# Altium PCB DHT11_v2_PCB.PcbDoc
Units mm, origin at the board's own origin, x right, y up, seen from the top; angles counter-clockwise.
Board outline 22.5 x 38.5 mm, 2 copper layers (Top Layer, Bottom Layer), stack 1.571 mm thick; 5 components, 4 nets, 18 pads, 2 vias.
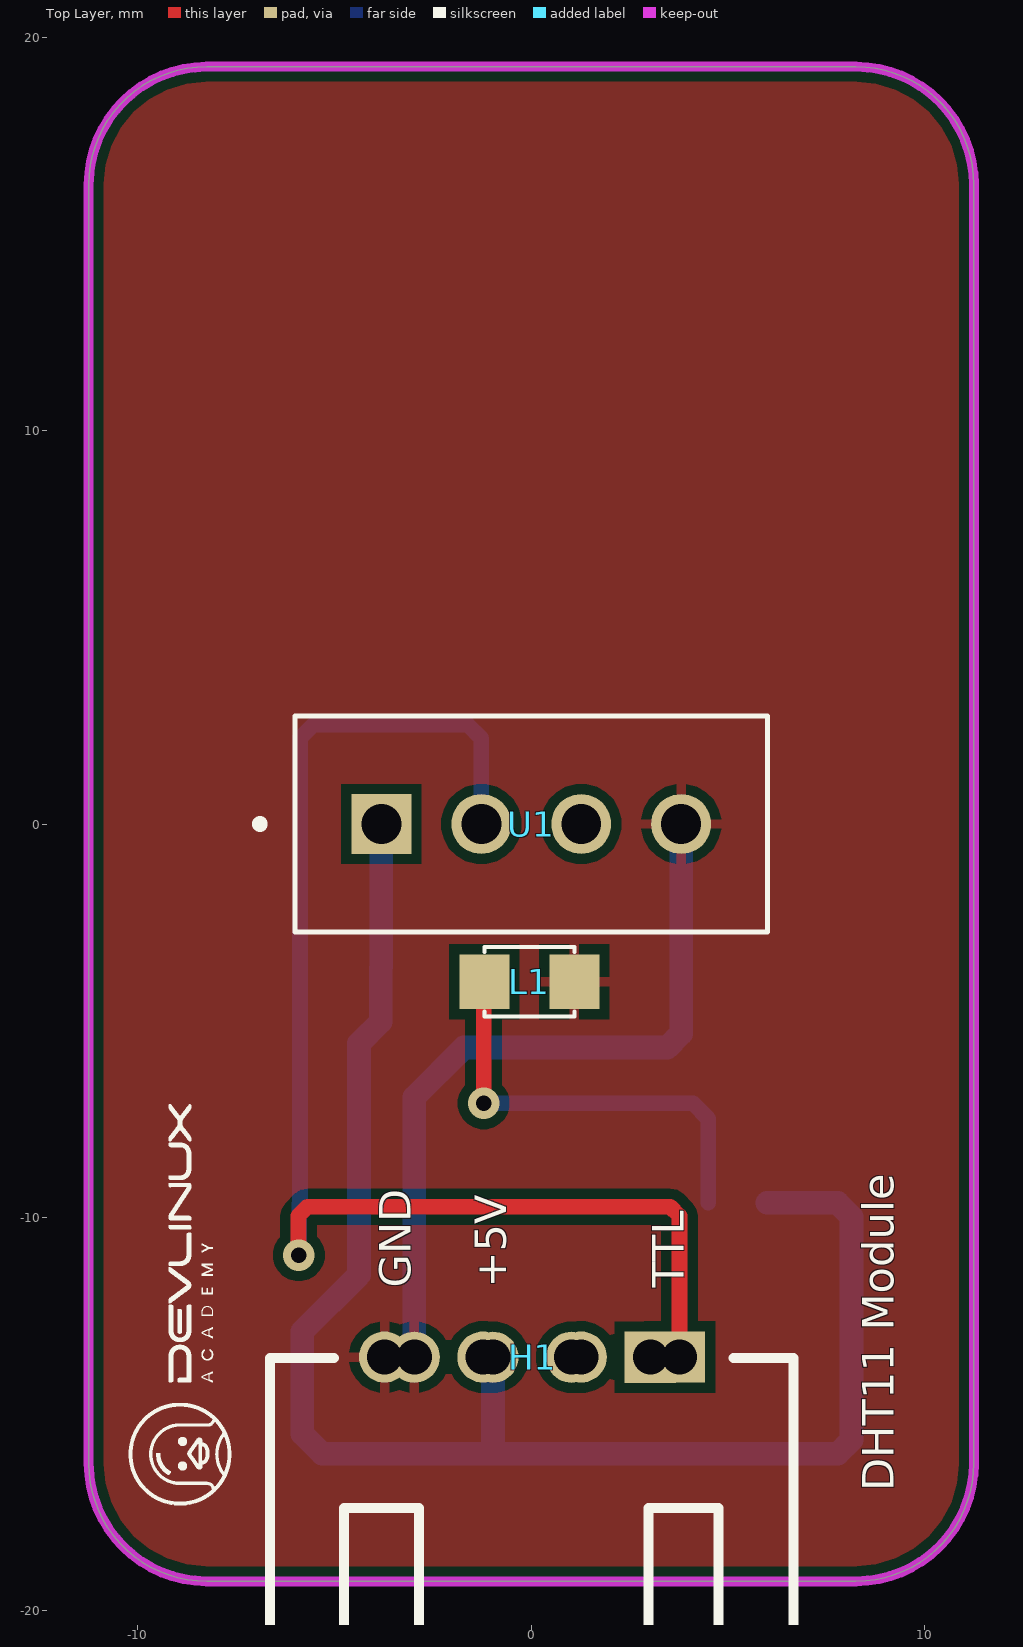
[diagram p0: Top Layer view]
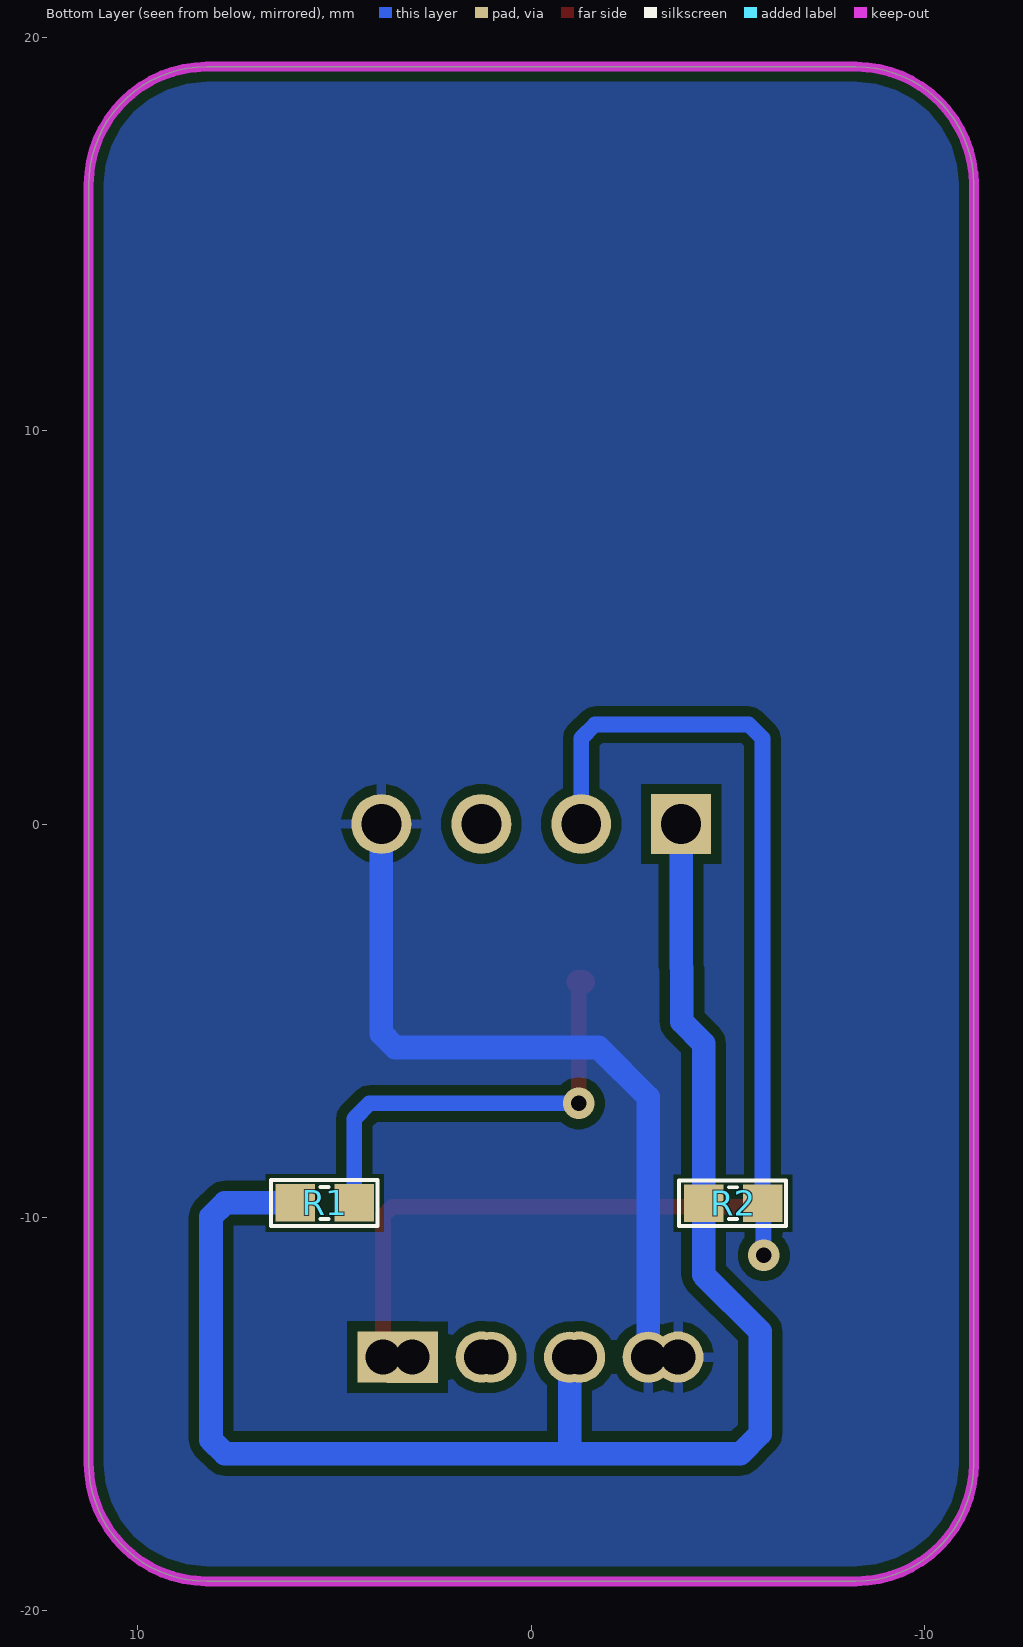
[diagram p1: Bottom Layer view, seen from below]
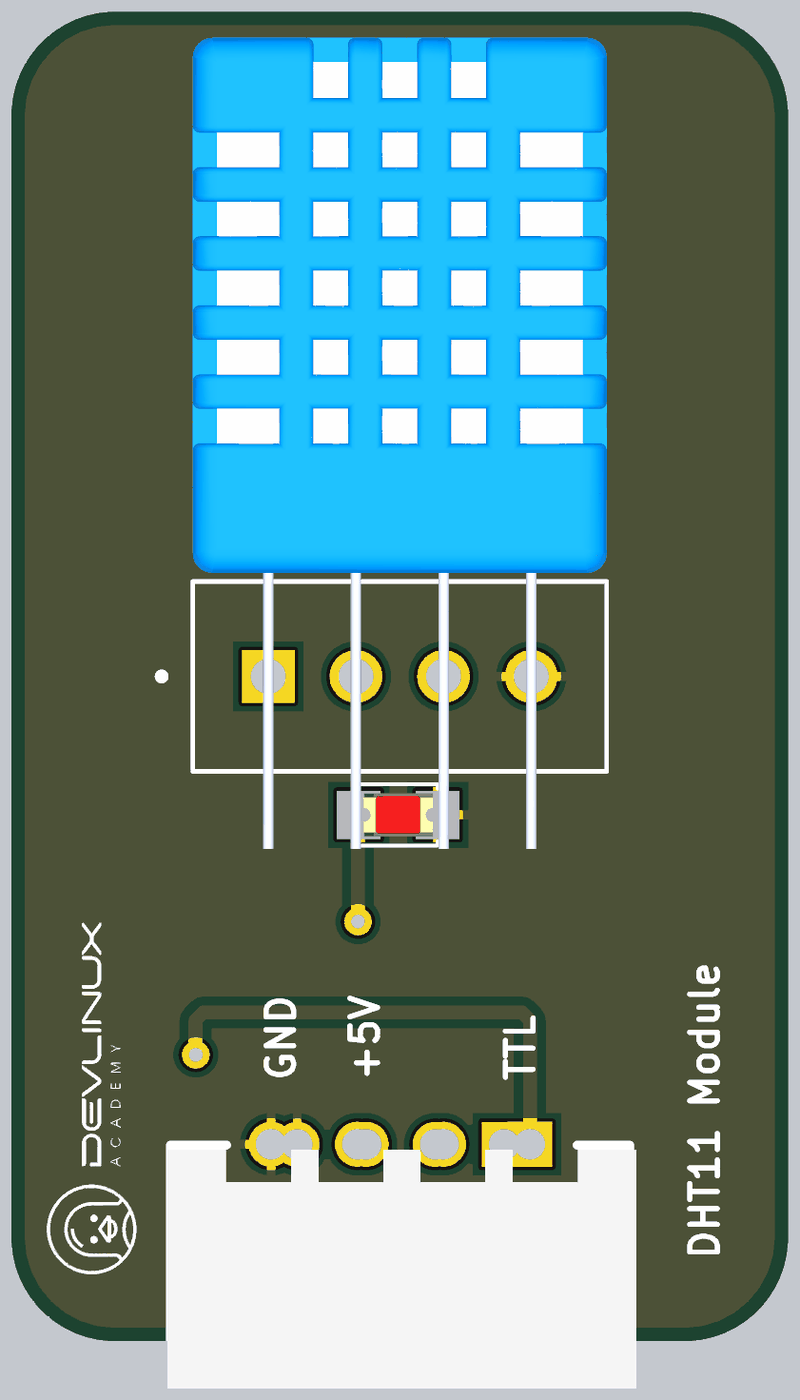
[diagram p2: 3D render of the assembled board from above, using the file's embedded part models]

## Layer stack, top to bottom
Top Solder: solder mask 0.0102, Solder Resist, Dk 3.5
Top Layer: signal copper 0.0356
Dielectric 1: dielectric 1.5, FR-4, Dk 4.8
Bottom Layer: signal copper 0.0356
Bottom Solder: solder mask 0.0102, Solder Resist, Dk 3.5

## Board outline
-11.25,-16.25 -11.25,16.25 cw(c-8.25,16.25) -8.25,19.25 8.25,19.25 cw(c8.25,16.25) 11.25,16.25 11.25,-16.25 cw(c8.25,-16.25) 8.25,-19.25 -8.25,-19.25 cw(c-8.25,-16.25)

## Design rules (kind name [scope] priority, off if disabled: settings)
Clearance [All] p1: gap=0.254 ignorepadtopadclearanceinfootprint=FALSE except(0: Arc-Hole Track-Hole SMDPad-Hole THPad-Hole Via-Hole Fill-Hole Poly-Hole Region-Hole Text-Hole)
PolygonConnect [All] p1: connectstyle=Relief reliefconductorwidth=0.254 reliefentries=4 polygonreliefangle="90 Angle" airgapwidth=0.254
RoomDefinition DHT11_v2_SCH [InComponentClass('DHT11_v2_SCH')] p1: confinementstyle=ConfineIn formatcopy=TRUE lockcomponents=FALSE outline 35.393,-23.204 79.335,-23.204 79.335,3.212 35.393,3.212
RoutingVias [All] p1: holewidth=0.4 width=0.6 viastyle="Through Hole" minholewidth=0.3 minwidth=0.8 maxholewidth=0.5 maxwidth=1
SolderMaskExpansion [All] p1: expansion=0.102 istentingtop=FALSE
Width [All] p1: maxlimit=0.6 minlimit=0.254 preferedwidth=0.4
30 further rules are at their usual default settings.

## Components (designator, comment, footprint, x,y, rotation, side; value= is the part's Value field where it differs from the comment)
H1 "Header 4P 2.54 + 2.0 Duc Cong" "Header 4P DC 2.54 + 2.0" 3.745,-13.575 r270 top
L1 "LED 0805" LED-0805-Red -1.19,-4.01 r0 top
R1 "1k" "tro smd 0603" 5.25,-9.63 r0 bottom
R2 "10k" "tro smd 0603" -5.13,-9.64 r0 bottom
U1 "DHT11" DHT11 0,0 r0 top

## Footprints (in the part's own frame and the unit in brackets; to place one, negate y for a bottom-side part, rotate by r counter-clockwise, add the part's x,y. Pads: shape width x height; smd on the part's side, far side on the other; paste and mask are expansions set on the pad)
DHT11 [mil]
  rect 60x60 hole 40: 1(-150,0)
  round 60 hole 40: 2(-50,0) 3(50,0) 4(150,0)
  silkscreen extent -276,-108 236,108, body extent -236,-197 236,728, height 108
"Header 4P DC 2.54 + 2.0" [mm]
  rect 1.3x1.3 hole 0.889: 1(-0.025,0.025) 1(-0.022,-0.719)
  round 1.3 hole 0.889: 2(-0.025,-2.475) 2(-0.022,-2.719) 3(-0.025,-4.975) 3(-0.022,-4.719) 4(-0.025,-7.475) 4(-0.022,-6.718)
  silkscreen extent 0,-10.39 7.11,2.92, body extent 0.13,-10.48 7.06,3.11, height 7.38
LED-0805-Red [mil]
  rect 50x55 smd: 1(0,0) 2(90,0)
  silkscreen extent 0,-35 90,35, body extent 5,-25 85,25, height 43
"tro smd 0603" [mm] "Chip Capacitor, 2-Leads, Body 1,60x0,80mm, IPC Medium Density"
  rect 1x0.95 smd mask+0.076: 1(-0.75,0) 2(0.75,0)
  silkscreen extent -1.35,-0.58 1.37,0.58, body extent -0.82,-0.42 0.82,0.43, height 0.44

## Part data
H1: "Cắm", Chung_Loai=Cắm, Don_Vi=Con, Ma_Hang=MH001310, Ten_Linh_Kien="Header 4P XH2.54-4P Đực Cong"
L1: library part "LED 0805 Do", "Dán", Chung_Loai=Dán, Don_Vi=Con, Ma_Hang=MH000897, Ten_Linh_Kien="LED 0805 Màu Đỏ (Red)"
R1 R2: library part "Tro 0603 1% 10k", "Dán", Chung_Loai=Dán, Don_Vi=Con, Ma_Hang=MH006333, So_Chan=2, Ten_Linh_Kien="Trở 0603 1% 10k"
U1: "DHT11 basic temperature-humidity sensor + extras", Package=None, Availability=Unavailable, MF="Adafruit Industries", MP=ADA386, Price=None, SnapEDA_Link=https://www.snapeda.com/parts/ADA386/Adafruit%20Industries/view-part/106068/?ref=snap

## Via types
v1: diameter 0.8, hole 0.4, Top Layer to Bottom Layer, 2 vias

## Nets (pads, with @x,y where several pads share a name; then routed paths per layer and width w, separated by ;. In a path a pad name is that pad's centre, name@x,y a point inside that pad or via, vN(x,y) a via of type N, cw(c..) or ccw(c..) an arc to the next point about the centre after c; other vN are vias at no path point)
+5: H1.3 R1.2 R2.2 U1.1 | length 41.1
  Bottom Layer w0.6: U1.1 -3.81,-3.636 -3.828,-3.654 -3.828,-5.028 -4.38,-5.58 -4.38,-11.46 -5.82,-12.9 -5.82,-15.5 -5.314,-16.006 -0.974,-16.006 ; H1.3@-0.974,-13.553 -0.974,-16.006 ; R1.2 7.789,-9.63 8.14,-9.981 8.14,-15.654 7.789,-16.006 -0.974,-16.006
GND: H1.4 L1.2 U1.4 | length 19.4
  Bottom Layer w0.6: H1.4@-2.974,-13.553 -2.974,-6.944 -1.71,-5.68 3.459,-5.68 3.81,-5.329 U1.4
NetL1_1: L1.1 R1.1 | length 11.3
  Top Layer w0.4: L1.1@-1.315,-4.015 -1.21,-4.12 v1(-1.21,-7.1)
  Top Layer w0.6: L1.1@-1.315,-4.015 -1.195,-4.015 L1.1
  Bottom Layer w0.4: v1(-1.21,-7.1) 4.11,-7.1 4.5,-7.49 R1.1
TTL: H1.1 R2.1 U1.2 | length 34.7
  Top Layer w0.4: v1(-5.91,-10.96) -5.92,-10.95 -5.92,-9.964 -5.686,-9.73 3.536,-9.73 3.77,-9.964 H1.1@3.77,-13.55
  Bottom Layer w0.4: v1(-5.91,-10.96) -5.895,-10.945 -5.895,-9.655 R2.1 -5.88,2.179 -5.529,2.53 -1.621,2.53 -1.27,2.179 U1.2
pads on no net: H1.2 U1.3

## Polygon pours and split planes (outlines as drawn)
GND on Bottom Layer "NONET_L-01_P-001" (solid, remove dead copper, pour order 0): -11.25,19.25 11.25,19.25 11.25,-19.25 -11.25,-19.25
GND on Top Layer "NONET_L-01_P-001" (solid, remove dead copper, pour order 1): -11.25,-19.25 11.25,-19.25 11.25,19.25 -11.25,19.25

## Keep-outs
Keep-Out Layer:
  lines w0.254: -73.52,-50.028 -73.42,-50.128 ; -11.25,-16.25 ccw(c-8.25,-16.25) -8.25,-19.25 8.25,-19.25 ccw(c8.25,-16.25) 11.25,-16.25 11.25,16.25 ccw(c8.25,16.25) 8.25,19.25 -8.25,19.25 ccw(c-8.25,16.25) -11.25,16.25 -11.25,-16.25

## Silkscreen, mask and mechanical layers (free items; w line width, h text height)
Top Overlay:
  drawing of 21 lines, arcs and shapes, not listed
  text "GND" at -3.07,-11.783 h0.8 r90
  text "+5V" at -0.637,-11.783 h0.8 r90
  text "TTL" at 3.87,-11.783 h0.8 r90
  text "DHT11 Module" at 9.21,-16.96 h0.8 r90